# Altium PCB Copy4 of PWR_PCB.PcbDoc (part 3 of 3)
Units mil, origin at the board's own origin, x right, y up, seen from the top; angles counter-clockwise.
Board outline 8100 x 5345 mil, 4 copper layers (Top Layer, GND Layer, Power Layer, Bottom Layer), stack 27.912 mil thick; 117 components, 88 nets, 440 pads, 3252 vias.
Unrouted connection lines stored in the file: 22.
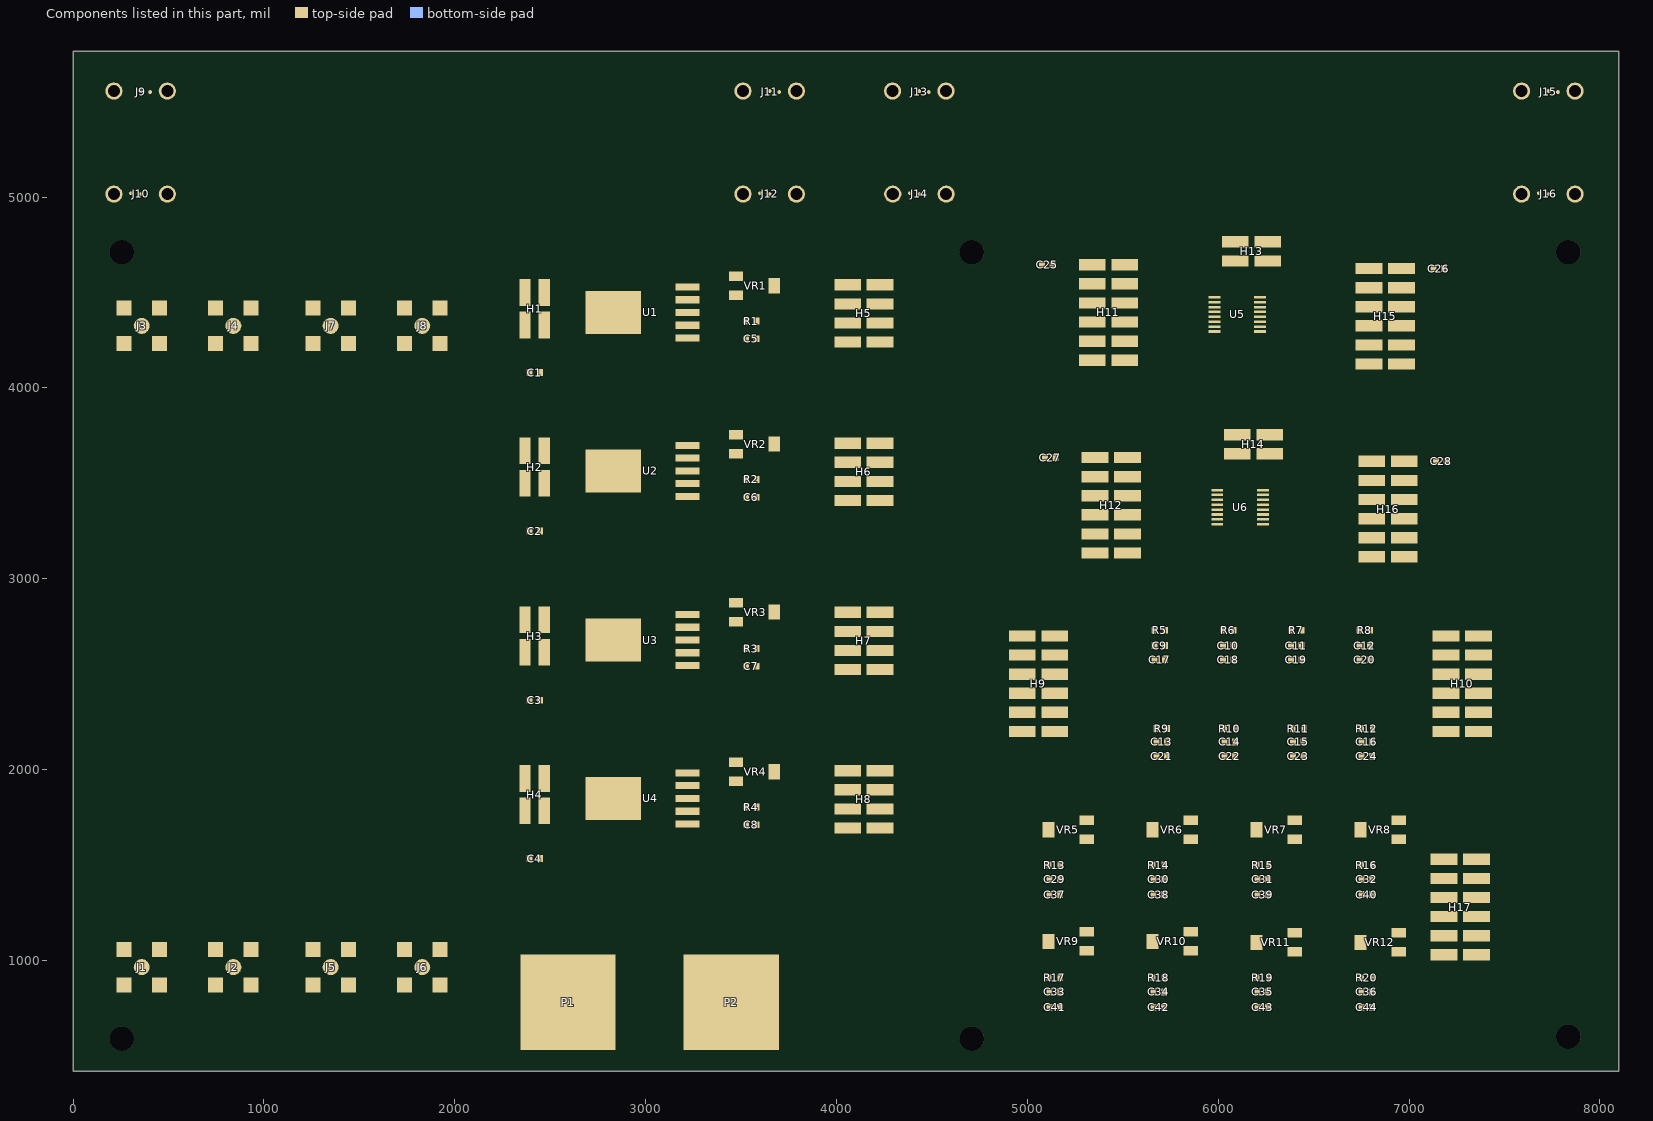
[diagram p5: the components of this part, seen from the top]

## Silkscreen, mask and mechanical layers (free items; w line width, h text height)
Top Overlay:
  drawing of 635 lines, arcs and shapes, not listed
  text "12" at 5321,4714 h40
  text "6" at 5497,4714 h40
  text "12" at 6766,4697 h40
  text "6" at 6940,4695 h40
  text "VDD0" at 3982,4620 h40
  text "VSS" at 4184,4620 h40
  text "1" at 5510,4036 h40
  text "7" at 5335,4031 h40
  text "1" at 6950,4012 h40
  text "7" at 6778,4010 h40
  text "VDD1" at 3988,3788 h40
  text "VSS" at 4190,3788 h40
  text "6" at 5499,3708 h40
  text "12" at 5342,3707 h40
  text "12" at 6776,3688 h40
  text "6" at 6959,3685 h40
  text "1" at 5511,3024 h40
  text "7" at 5337,3022 h40
  text "1" at 6972,3003 h40
  text "7" at 6797,3002 h40
  text "VDD2" at 3989,2902 h40
  text "VSS" at 4191,2902 h40
  text "1" at 7192,2783 h40
  text "1" at 4971,2781 h40
  text "7" at 7349,2781 h40
  text "7" at 5128,2779 h40
  text "6" at 7177,2091 h40
  text "12" at 7339,2089 h40
  text "12" at 5118,2087 h40
  text "6" at 4956,2086 h40
  text "VDD3" at 3981,2071 h40
  text "VSS" at 4183,2071 h40
  text "1" at 7175,1611 h40
  text "7" at 7332,1609 h40
  text "200Gbps TX Power Board V1" at 3868,1142 h30
  text "Feb 2021" at 4060,1071 h30
  text "VDD33" at 2354,1048 h60
  text "GND" at 3232,1048 h60
  text "12" at 7322,917 h40
  text "6" at 7160,916 h40
Top Solder:
  lines w60: 354,5015 354,5220 414,5280 3590,5280 3650,5220 3650,5015 ; 354,5555 354,5350 414,5290 3590,5290 ; 360,965 535,965 595,1025 595,4265 535,4325 360,4325 ; 840,965 665,965 605,1025 605,4265 665,4325 840,4325 ; 1350,965 1525,965 1585,1025 1585,4265 1525,4325 1350,4325 ; 1830,965 1655,965 1595,1025 1595,4265 1655,4325 1830,4325 ; 4434,5015 4434,5220 4494,5280 7670,5280 7730,5220 7730,5015 ; 4434,5555 4434,5350 4494,5290 7670,5290 ; 3590,5290 3650,5350 ; 3590,5290 3650,5350 ; 3650,5350 3650,5555 3650,5350 ; 7670,5290 7730,5350 ; 7670,5290 7730,5350 ; 7730,5350 7730,5555 7730,5350
Mechanical 1:
  lines w10: 8100,420 0,420 0,5765 8100,5765 8100,425